# EAGLE board TMC2130-Eval_v13 (EAGLE 6.2)
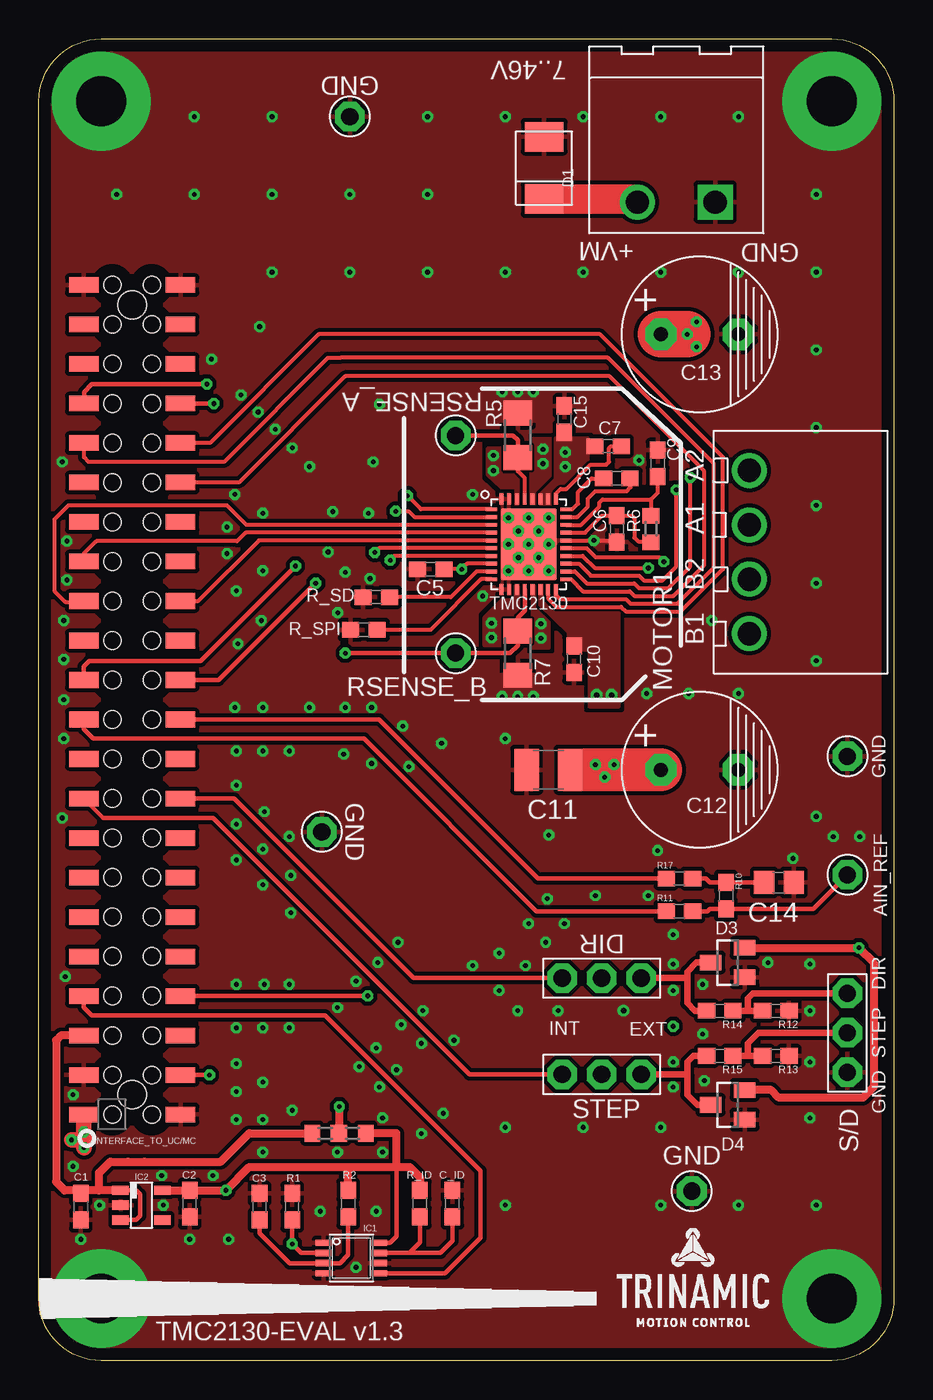
[diagram p0: board, top side]
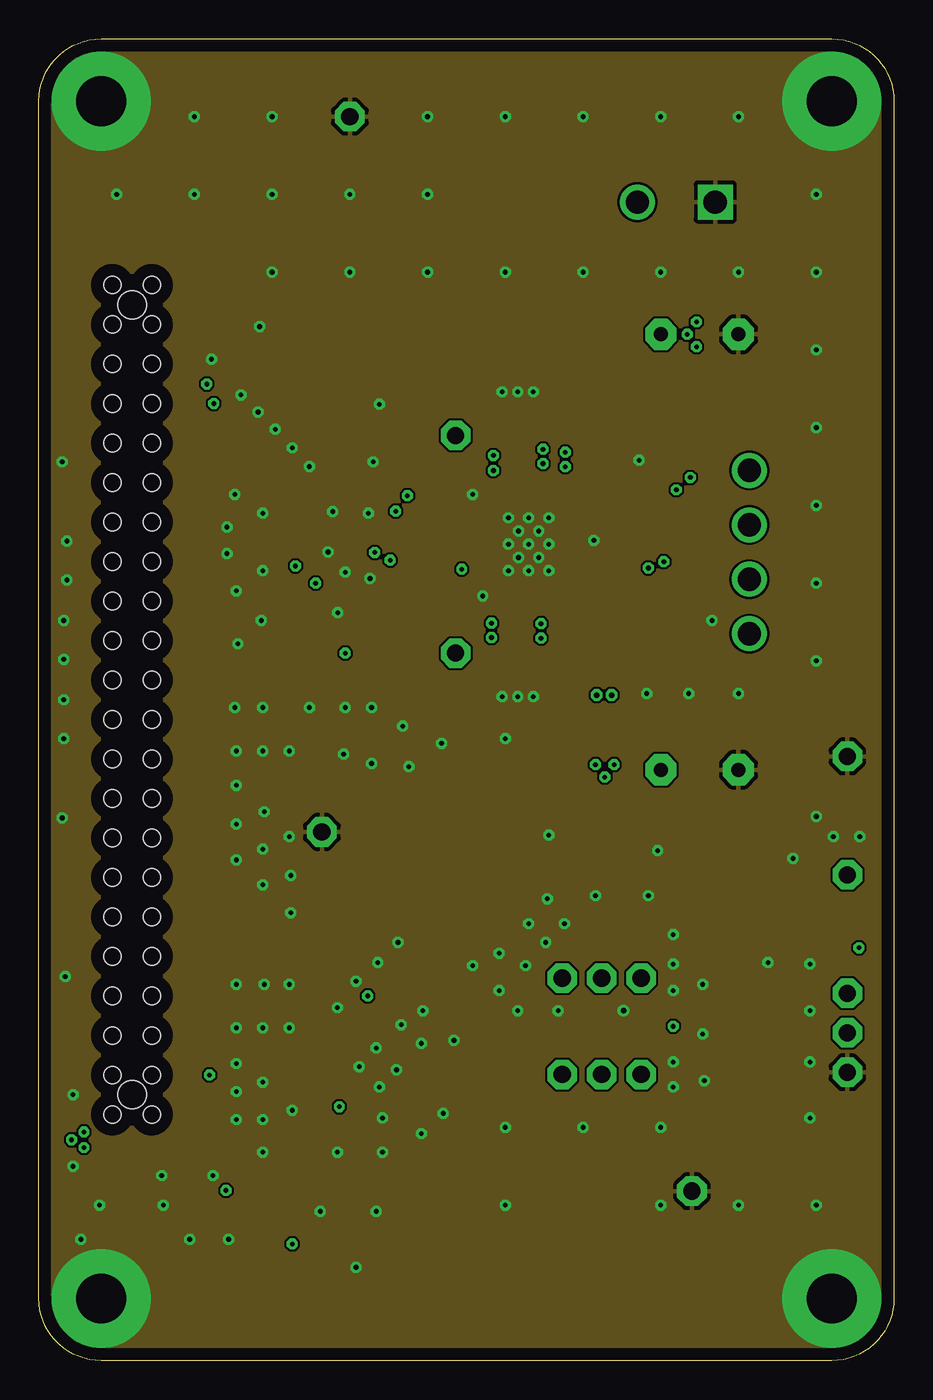
[diagram p1: board, inner layer Route2]
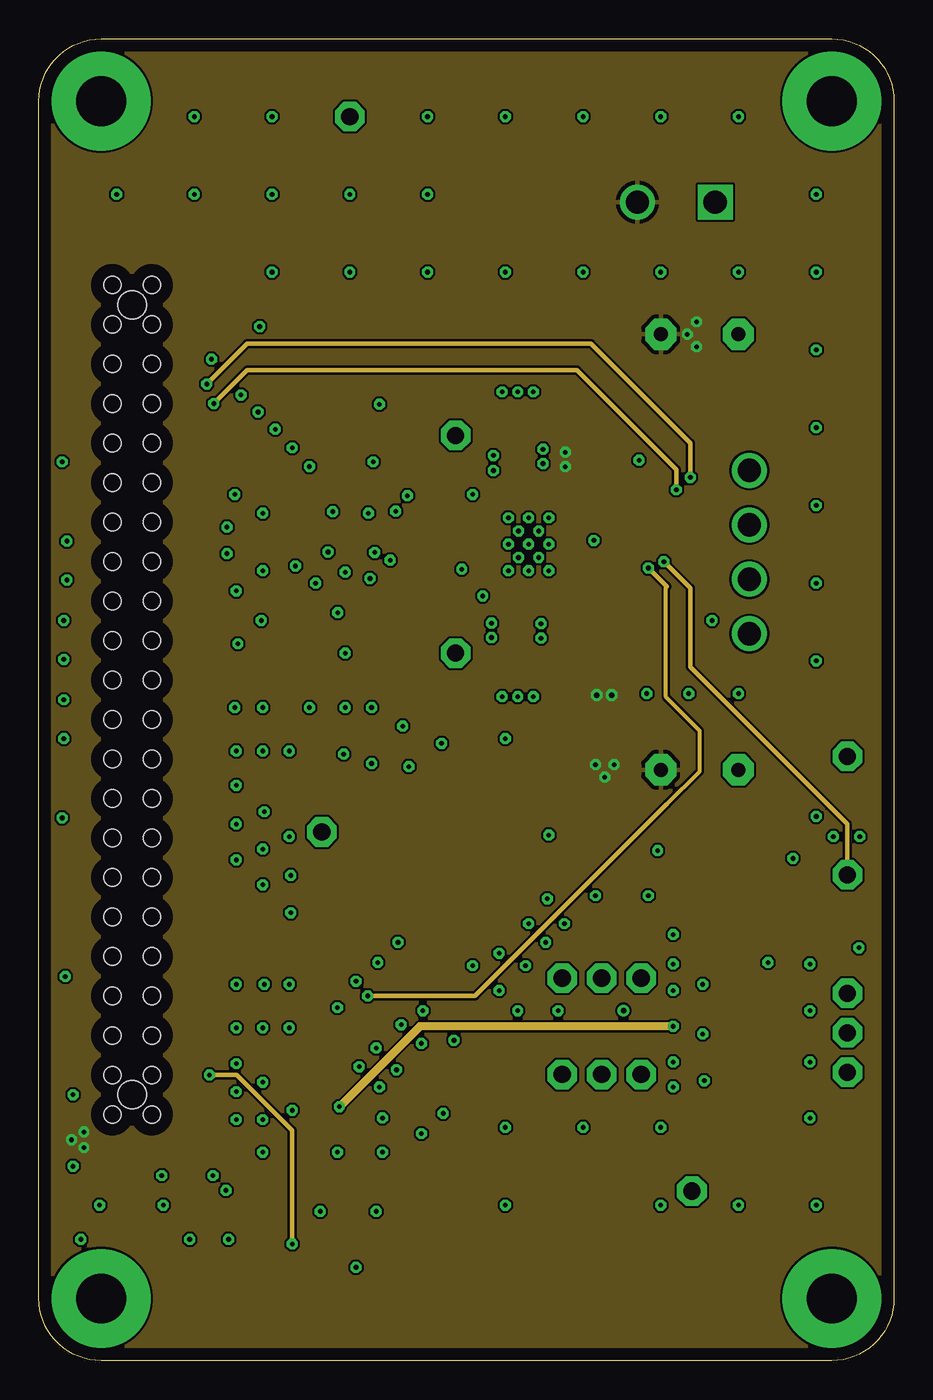
[diagram p2: board, inner layer Route3]
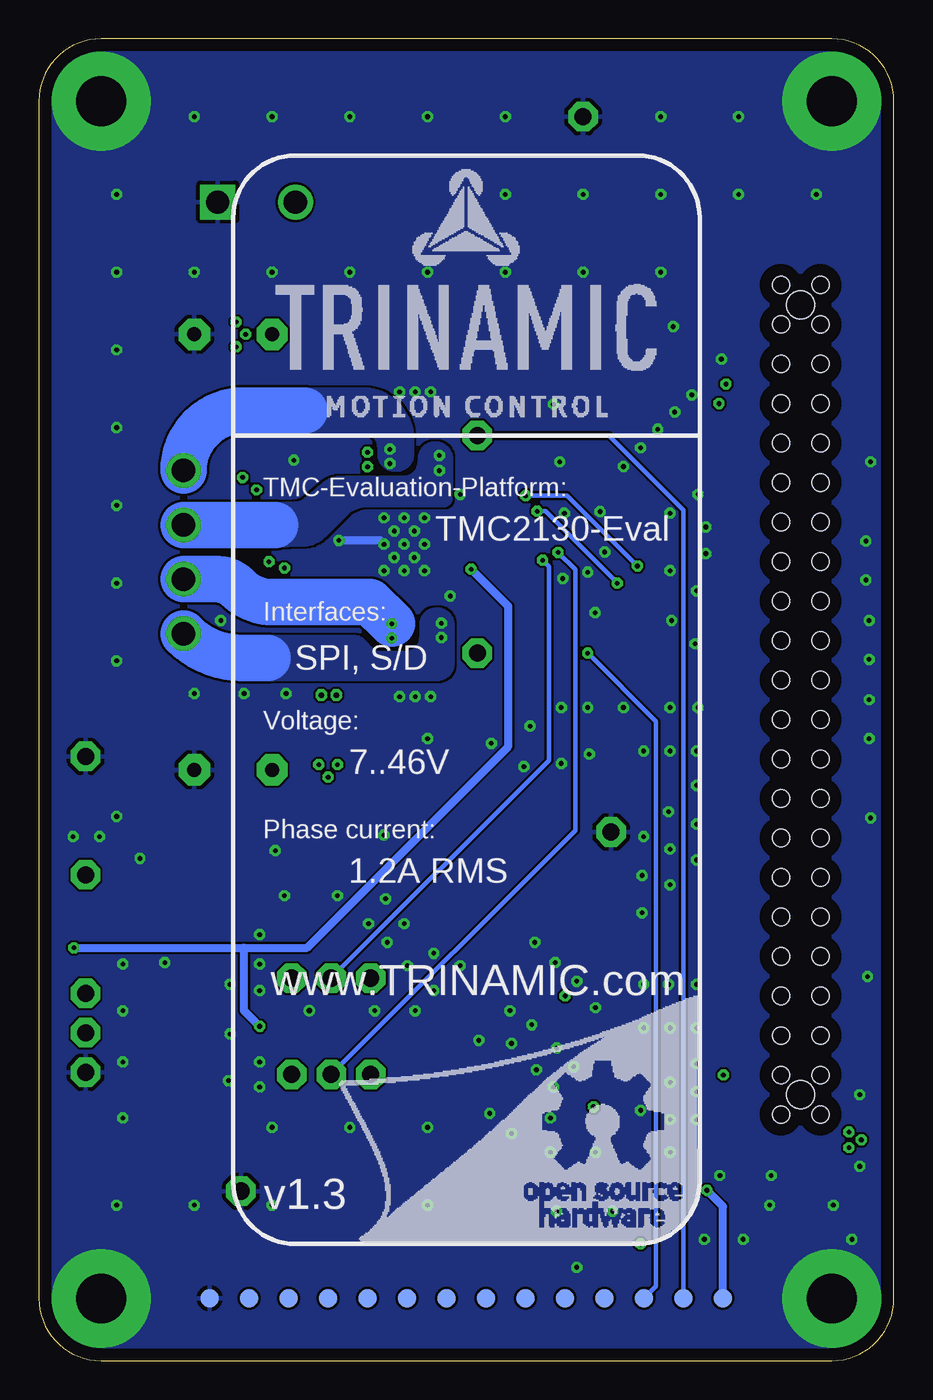
[diagram p3: board, bottom side, seen from below]

Size 55 x 85 mm. Coordinates in mm from the lower left corner, seen from the top.
Outline: 51,0 4,0 arc-90 0,4 0,81 arc-90 4,85 51,85 arc-90 55,81 55,4 arc-90 51,0
Copper layers (1*2*3*16): Top 0.018mm / dielectric 0.36mm / Route2 0.035mm / dielectric 0.71mm / Route3 0.035mm / dielectric 0.2mm / Bottom 0.018mm
Design rules: minimum track width 0.15mm, minimum drill 0.25mm, track to track 0.15mm, track to pad 0.15mm, pad to pad 0.1mm, via to via 0.15mm, smd to smd 0mil, copper to edge 0.8mm, drill to drill 8mil, minimum pad ring 10mil, minimum via ring 8mil, stop-mask expansion 4mil, vias tented up to drill 0.4mm, thermal gap 10mil
Net classes: 0 default: width 0.254 mm, drill 0.3 mm

## Footprints (pad centres in the part's own frame; a part is rotated, then mirrored left to right if it is on the bottom)
1PIN_1ROW_THT = drill 1.1 pad 1.9 octagon: 1 0,0
RCL_0603 = smd 1.1 x 1: 1 -0.85,0; 2 0.85,0
C0603 = smd 1.1 x 1: 1 -0.85,0; 2 0.85,0
C1210 = smd 1.6 x 2.7: 1 -1.4,0; 2 1.4,0
C_POL_RAD_THT_5X10X12.5 = drill 0.9 pad 2 octagon: + 2.5,0; - -2.5,0
C0805 = smd 1.3 x 1.5: 1 -0.95,0; 2 0.95,0
SMB = smd 1.9 x 2.5: A 2,0; C -2,0
SOT23 = smd 1 x 1.4: 1 -0.95,-1.1; 2 0.95,-1.1; 3 0,1.1
SN74LVC1G123DCTR = smd 0.4 x 1: 1 -0.975,-1.8; 2 -0.325,-1.8; 3 0.325,-1.8; 4 0.975,-1.8; 5 0.975,1.8; 6 0.325,1.8; 7 -0.325,1.8; 8 -0.975,1.8
SOT23-5 = smd 0.6 x 1.05: 1 -0.95,-1.35; 2 0,-1.35; 3 0.95,-1.35; 4 0.95,1.35; 5 -0.95,1.35
FEMALE_HEADER_SMD_254_44_PIN_SHORTPADS_HOLES = smd 1 x 1.9: 1 -26.67,3.11; 2 -26.67,-3.11; 3 -24.13,3.11; 4 -24.13,-3.11; 5 -21.59,3.11; 6 -21.59,-3.11; 7 -19.05,3.11; 8 -19.05,-3.11; 9 -16.51,3.11; 10 -16.51,-3.11; 11 -13.97,3.11; 12 -13.97,-3.11; 13 -11.43,3.11; 14 -11.43,-3.11; 15 -8.89,3.11; 16 -8.89,-3.11; 17 -6.35,3.11; 18 -6.35,-3.11; 19 -3.81,3.11; 20 -3.81,-3.11; 21 -1.27,3.11; 22 -1.27,-3.11; 23 1.27,3.11; 24 1.27,-3.11; 25 3.81,3.11; 26 3.81,-3.11; 27 6.35,3.11; 28 6.35,-3.11; 29 8.89,3.11; 30 8.89,-3.11; 31 11.43,3.11; 32 11.43,-3.11; 33 13.97,3.11; 34 13.97,-3.11; 35 16.51,3.11; 36 16.51,-3.11; 37 19.05,3.11; 38 19.05,-3.11; 39 21.59,3.11; 40 21.59,-3.11; 41 24.13,3.11; 42 24.13,-3.11; 43 26.67,3.11; 44 26.67,-3.11 | hole 1.8: -25.4,0; 25.4,0 | hole 1.1: -26.67,1.27; -24.13,1.27; -21.59,1.27; -19.05,1.27; -16.51,1.27; -13.97,1.27; -11.43,1.27; -8.89,1.27; -6.35,1.27; -3.81,1.27; -1.27,1.27; 1.27,1.27; 3.81,1.27; 6.35,1.27; 8.89,1.27; 11.43,1.27; 13.97,1.27; 16.51,1.27; 19.05,1.27; 21.59,1.27; 24.13,1.27; 26.67,1.27; -26.67,-1.27; -24.13,-1.27; -21.59,-1.27; -19.05,-1.27; -16.51,-1.27; -13.97,-1.27; -11.43,-1.27; -8.89,-1.27; -6.35,-1.27; -3.81,-1.27; -1.27,-1.27; 1.27,-1.27; 3.81,-1.27; 6.35,-1.27; 8.89,-1.27; 11.43,-1.27; 13.97,-1.27; 16.51,-1.27; 19.05,-1.27; 21.59,-1.27; 24.13,-1.27; 26.67,-1.27
AKL169_04_POL = drill 1.5: 1 -5.25,3.3; 2 -1.75,3.3; 3 1.75,3.3; 4 5.25,3.3
AKL349_02_POL = drill 1.5 square: 1 -2.5,4 | drill 1.5: 2 2.5,4
R1206 = smd 1.6 x 1.803: 1 -1.422,0; 2 1.422,0
R0603 = smd 1 x 1.1: 1 -0.85,0; 2 0.85,0
0603 = smd 1.1 x 1: 1 -0.85,0; 2 0.85,0
3PIN_1ROW_2,54_THT = drill 1.1 pad 1.9 octagon: 1 -2.54,0; 2 0,0; 3 2.54,0
PAD_R1.2 = smd 1.2 x 1.2: P$1 0,0
QFN36 = smd 0.7 x 0.25: 1 -2.4,2.25; 2 -2.4,1.75; 3 -2.4,1.25; 4 -2.4,0.75; 5 -2.4,0.25; 6 -2.4,-0.25; 7 -2.4,-0.75; 8 -2.4,-1.25; 9 -2.4,-1.75; 10 -2.4,-2.25; 19 2.4,-2.25; 20 2.4,-1.75; 21 2.4,-1.25; 22 2.4,-0.75; 23 2.4,-0.25; 24 2.4,0.25; 25 2.4,0.75; 26 2.4,1.25; 27 2.4,1.75; 28 2.4,2.25 | smd 0.25 x 0.7: 11 -1.75,-2.9; 12 -1.25,-2.9; 13 -0.75,-2.9; 14 -0.25,-2.9; 15 0.25,-2.9; 16 0.75,-2.9; 17 1.25,-2.9; 18 1.75,-2.9; 29 1.75,2.9; 30 1.25,2.9; 31 0.75,2.9; 32 0.25,2.9; 33 -0.25,2.9; 34 -0.75,2.9; 35 -1.25,2.9; 36 -1.75,2.9 | smd 3.6 x 4.6: GND_PAD 0,0

## Placement (x,y rotation side)
AIN_REF  NOT ASSEMBLED  [1PIN_1ROW_THT]  52,31.24 90 top
C1  0603/4.7µF/10V  [RCL_0603]  2.7,9.9 270 top
C2  0603/4.7µF/10V  [RCL_0603]  9.7,10.1 270 top
C3  0603/10nF/10V  [RCL_0603]  14.2,9.9 90 top
C5  C0603/100nF/50V  [C0603]  25.2,50.9 180 top
C6  C0603/4µ7/16V  [C0603]  37.17,53.49 270 top
C7  C0603/100nF/50V  [C0603]  36.61,58.8 0 top
C8  C0603/22nF/50V  [C0603]  37.17,56.74 0 top
C9  C0603/470nF/16V  [C0603]  39.8,57.7 270 top
C10  C0603/100nF/50V  [C0603]  34.42,45.11 90 top
C11  1210/4.7uF/100V  [C1210]  32.77,38 180 top
C12  EEUFR1J151 150uF/63V/0R045  [C_POL_RAD_THT_5X10X12.5]  42.5,38 180 top
C13  EEUFR1J151 150uF/63V/0R045  [C_POL_RAD_THT_5X10X12.5]  42.5,66 180 top
C14  0805/4µ7/50V  [C0805]  47.6,30.75 180 top
C15  C0603/100nF/50V  [C0603]  33.8,60.55 270 top
C_ID  C_ID/10V/1%  [RCL_0603]  26.6,10.1 90 top
D1  SMBJ43A  [SMB]  32.5,76.7 90 top
D3  BAT54S  [SOT23]  44.3,25.6 90 top
D4  BAT54S  [SOT23]  44.3,16.45 90 top
IC1  SN74LVC1G123DCTR  [SN74LVC1G123DCTR]  20.1,6.6 270 top
IC2  LP2985AIM5-3.3  [SOT23-5]  6.6,10 270 top
INTERFACE_TO_UC/MC  [FEMALE_HEADER_SMD_254_44_PIN_SHORTPADS_HOLES]  6,42.5 90 top
JMP1  JUMPER_2.54MM BLACK ON X2  [EXTRA_TERMINAL]  -3.02,0 0 top  (outside the outline)
JMP2  JUMPER_2.54MM BLACK ON X1  [EXTRA_TERMINAL]  -4.03,0 0 top  (outside the outline)
MOTOR1  AKL182_04_POL_HEADER  [AKL169_04_POL]  49,52 90 top
PROBE_GND  NOT ASSEMBLED  [1PIN_1ROW_THT]  18.2,34 0 top
PROBE_GND1  NOT ASSEMBLED  [1PIN_1ROW_THT]  52,38.86 180 top
PROBE_GND2  NOT ASSEMBLED  [1PIN_1ROW_THT]  42,10.9 0 top
PROBE_GND3  NOT ASSEMBLED  [1PIN_1ROW_THT]  20,80 180 top
PWR  AKL_349_02_POL_HEADER  [AKL349_02_POL]  41,78.5 180 top
R1  0603/10k/1%  [RCL_0603]  16.3,9.9 90 top
R2  10K  [RCL_0603]  19.9,10.1 270 top
R5  R1206,0R22/0.5W  [R1206]  30.8,59.5 270 top
R6  0603/2R2/1%  [R0603]  39.36,53.49 90 top
R7  R1206,0R22/0.5W  [R1206]  30.8,45.5 90 top
R8  NOT ASSEMBLED  [R0603]  18.43,14.62 180 top
R9  0603/0R  [R0603]  20.18,14.62 180 top
R10  10k/0603/1%  [RCL_0603]  44.2,29.9 270 top
R11  15k/0603/1%  [RCL_0603]  41.2,28.9 0 top
R12  0603/10k/1%  [0603]  47.4,22.5 180 top
R13  0603/10k/1%  [0603]  47.4,19.6 180 top
R14  0603/1k/1%  [0603]  43.8,22.5 180 top
R15  0603/1k/1%  [0603]  43.8,19.6 180 top
R17  4k7/0603/1%  [RCL_0603]  41.2,31 0 top
R_ID  R_ID/1%  [RCL_0603]  24.5,10.1 90 top
R_SD  NOT_ASSEMBLED  [RCL_0603]  21.7,49.1 0 top
R_SPI  NOT_ASSEMBLED  [RCL_0603]  20.9,47 0 top
REF2  MALE HEADER 2.54  [3PIN_1ROW_2,54_THT]  52,21.08 270 top
RSENSE_A  NOT ASSEMBLED  [1PIN_1ROW_THT]  26.8,59.5 0 top
RSENSE_B  NOT ASSEMBLED  [1PIN_1ROW_THT]  26.8,45.5 0 top
TERM1  AKL_330_2_POL_TERMINAL  [EXTRA_TERMINAL]  -1,-2 0 top
TERM2  AKL182_04_POL_TERMINAL  [EXTRA_TERMINAL]  -2,-4 0 top  (outside the outline)
TEST_POINT1  NOT ASSEMBLED  [PAD_R1.2]  11,4 0 bottom
TEST_POINT2  NOT ASSEMBLED  [PAD_R1.2]  13.54,4 0 bottom
TEST_POINT3  NOT ASSEMBLED  [PAD_R1.2]  16.08,4 0 bottom
TEST_POINT4  NOT ASSEMBLED  [PAD_R1.2]  18.62,4 0 bottom
TEST_POINT5  NOT ASSEMBLED  [PAD_R1.2]  21.16,4 0 bottom
TEST_POINT6  NOT ASSEMBLED  [PAD_R1.2]  26.24,4 0 bottom
TEST_POINT7  NOT ASSEMBLED  [PAD_R1.2]  23.7,4 0 bottom
TEST_POINT8  NOT ASSEMBLED  [PAD_R1.2]  28.78,4 0 bottom
TEST_POINT9  NOT ASSEMBLED  [PAD_R1.2]  31.32,4 0 bottom
TEST_POINT10  NOT ASSEMBLED  [PAD_R1.2]  33.86,4 0 bottom
TEST_POINT11  NOT ASSEMBLED  [PAD_R1.2]  36.4,4 0 bottom
TEST_POINT12  NOT ASSEMBLED  [PAD_R1.2]  38.94,4 0 bottom
TEST_POINT13  NOT ASSEMBLED  [PAD_R1.2]  41.48,4 0 bottom
TEST_POINT14  NOT ASSEMBLED  [PAD_R1.2]  44.02,4 0 bottom
TMC2130  TMC2130_QFN36  [QFN36]  31.5,52.5 0 top
U$1  [TMC_EVAL_RIGHT_BAR]  0,0 0 top
U$3  [TMC_EVAL_BACK_NO_DOCU]  55,0 0 bottom
X1  MALE HEADER 2.54  [3PIN_1ROW_2,54_THT]  36.2,18.4 180 top
X2  MALE HEADER 2.54  [3PIN_1ROW_2,54_THT]  36.2,24.6 180 top

## Library data of the parts
AIN_REF JMP1 JMP2 PROBE_GND PROBE_GND1-PROBE_GND3 REF2 RSENSE_A RSENSE_B X1 X2 = _TMC_TE_con
C1-C3 C_ID IC1 IC2 R1 R2 R10 R11 R17 R_ID R_SD R_SPI = TMC_EVAL_driver_TE_v01
C5-C11 C14 C15 R5-R9 = rcl
C12 C13 R12-R15 = _TMC_TE_RCL
D1 = _TMC_TE_D
D3 D4 = Trinamic; ADGPN: 3522154300; DATASHEET: http://www.nxp.com/documents/data_sheet/BAT54_SERIES.pdf; MANUF-CODE-1: BAT54S; MANUFACTURER-1: Philips; PRICE: 0.11
INTERFACE_TO_UC/MC = _TMC_TE_con; 1_PARTNUMBER: 098-3-044-1-NFX-YT0; 1_SUPPLIER: MPE Garry; 2_PARTNUMBER: HLE-122-02-F-DV-A; 2_SUPPLIER: Samtec
MOTOR1 = _TMC_TE_con; 1_PARTNUMBER: 31182104; 1_SUPPLIER: RIA CONNECT; 2_PARTNUMBER: AKL 182-04; 2_SUPPLIER: Reichelt
PWR = _TMC_TE_con; 1_PARTNUMBER: 31330102; 1_SUPPLIER: RIA CONNECT; 2_PARTNUMBER: AKL 330-02; 2_SUPPLIER: REICHELT
TERM1 = _TMC_TE_con; 1_PARTNUMBER: 31349102; 1_SUPPLIER: RIA CONNECT; 2_PARTNUMBER: AKL 349-02; 2_SUPPLIER: Reichelt
TERM2 = _TMC_TE_con; 1_PARTNUMBER: 31169104; 1_SUPPLIER: RIA CONNECT; 2_PARTNUMBER: AKL 169-04; 2_SUPPLIER: Reichelt
TEST_POINT1-TEST_POINT14 = _TMC_TE_PADS
TMC2130 = Trinamic
U$1 U$3 = _TMC_TE_LOGOS

## Nets
+3V3: C2.1 IC1.8 IC2.5 R2.1 R9.1 R_ID.2 TEST_POINT1.P$1
+5V_USB: C1.1 IC2.1 IC2.3 INTERFACE_TO_UC/MC.5 R8.2
[REFL]_STEP: TMC2130.6 X1.2
[REFR]_DIR: TMC2130.7 X2.2
AIN_REF: AIN_REF.1 R10.2 R11.2 TMC2130.23
AIN_REF_PWM: INTERFACE_TO_UC/MC.22 R17.1
AIN_REF_SW: INTERFACE_TO_UC/MC.21 R11.1
CLK: INTERFACE_TO_UC/MC.23 TMC2130.1
CSN_CFG3: INTERFACE_TO_UC/MC.24 TMC2130.2
DRV_ENN_CFG6: INTERFACE_TO_UC/MC.8 TMC2130.22
ENCA_DCIN_CFG5: INTERFACE_TO_UC/MC.34 TMC2130.19
ENCB_DCEN_CFG4: INTERFACE_TO_UC/MC.35 TMC2130.18
ENCN_DCO: INTERFACE_TO_UC/MC.36 TMC2130.17
EXT_DIR: D3.3 R14.2 X2.1
EXT_DIR_CON: R12.2 R14.1 REF2.1
EXT_STEP: D4.3 R15.2 X1.1
EXT_STEP_CON: R13.2 R15.1 REF2.2
GND: C1.2 C2.2 C3.2 C5.2 C6.2 C9.1 C10.1 C11.2 C12.- C13.- C14.1 C15.1 C_ID.2 D1.A D3.1 D4.1 IC1.1 IC1.4 IC1.6 IC2.2 INTERFACE_TO_UC/MC.2 INTERFACE_TO_UC/MC.3 INTERFACE_TO_UC/MC.43 INTERFACE_TO_UC/MC.44 PROBE_GND1.1 PROBE_GND2.1 PROBE_GND3.1 PROBE_GND.1 PWR.1 R1.2 R5.1 R7.1 R12.1 R13.1 R_SD.1 R_SPI.1 REF2.3 TEST_POINT14.P$1 TMC2130.11 TMC2130.12 TMC2130.24 TMC2130.35 TMC2130.36 TMC2130.GND_PAD
ID_CH1: IC1.5 INTERFACE_TO_UC/MC.7
ID_CLK: IC1.2 INTERFACE_TO_UC/MC.4 R1.1
INT_DIR: INTERFACE_TO_UC/MC.18 X2.3
INT_STEP: INTERFACE_TO_UC/MC.17 X1.3
M1A: MOTOR1.3 TMC2130.34
M1A2: MOTOR1.4 TMC2130.32
M1B1: MOTOR1.1 TMC2130.13
M1B2: MOTOR1.2 TMC2130.15
N$1: C3.1 IC1.3 R2.2
N$2: C_ID.1 IC1.7 R_ID.1
N$3: R_SPI.2 TMC2130.10
N$5: R_SD.2 TMC2130.9
N$7: C6.1 R6.1 TMC2130.25
N$8: C8.1 TMC2130.28
N$9: C8.2 TMC2130.27
N$10: C7.2 TMC2130.29
N$11: C9.2 R6.2 TMC2130.26
N$14: C14.2 R10.1 R17.2
SCK_CFG2: INTERFACE_TO_UC/MC.27 TMC2130.3
SDI_NAI_CFG1: INTERFACE_TO_UC/MC.29 TMC2130.4
SDO_NAO_CFG0: INTERFACE_TO_UC/MC.28 TMC2130.5
SENSEA: R5.2 RSENSE_A.1 TEST_POINT2.P$1 TMC2130.33
SENSEB: R7.2 RSENSE_B.1 TEST_POINT3.P$1 TMC2130.14
SEP_DIAG1: INTERFACE_TO_UC/MC.38 TMC2130.21
SWN_DIAG0: INTERFACE_TO_UC/MC.37 TMC2130.20
VCC_IO: C5.1 D3.2 D4.2 R8.1 R9.2 TMC2130.8
VM: C7.1 C10.2 C11.1 C12.+ C13.+ C15.2 D1.C INTERFACE_TO_UC/MC.1 PWR.2 TMC2130.16 TMC2130.30 TMC2130.31

## Tracks (layer width: path | path; a pad name or v marks a point on that pad's centre or on a via)
+3V3  (via drill 0.3)
  Top 0.3: IC1.8 22.57,7.58 23,8 23,12.45
  Top 0.406: 21.05,14.6 R9.1
  Top 0.5: IC2.5 C2.1 v12.03,10.95 13.53,12.45 19.9,12.45 | 19.9,12.45 22.7,12.45 23,12.45 | 23,12.45 23.85,12.45 24.5,11.8 R_ID.2 | R2.1 19.9,12.45 | 23,12.45 23,14.62 R9.1
  Bottom 0.5: TEST_POINT1.P$1 11,9.92 v12.03,10.95
+5V_USB
  Top 0.3: IC2.1 6.25,10.95 6.5,10.7 6.5,9.3 6.25,9.05 IC2.3
  Top 0.5: IC2.1 3.88,10.95 | 3.88,10.95 2.5,10.95 | 2.5,10.95 C1.1 | 2.51,20.91 INTERFACE_TO_UC/MC.5 1.41,20.91 1.1,20.6 1.1,11.5 1.65,10.95 2.5,10.95 | R8.2 13.53,14.62 11.7,12.8 6.8,12.8 5.73,12.8 4.6,12.8 3.88,12.08 3.88,10.95
[REFL]_STEP  (via drill 0.3)
  Top 0.254: TMC2130.6 21.88,52.25 v21.6,51.98
  Bottom 0.3: X1.2 20.5,34.1 20.5,50.88 v21.6,51.98
[REFR]_DIR  (via drill 0.3)
  Top 0.254: TMC2130.7 22.88,51.75 v22.6,51.48
  Bottom 0.3: X2.2 22.2,38.6 22.2,51.08 v22.6,51.48
AIN_REF  (via drill 0.3)
  Top 0.254: TMC2130.23 35.23,52.25 35.8,51.67 39.9,51.67 v40.2,51.38
  Top 0.3: R11.2 43,28.9 43.15,29.05 R10.2 49.81,29.05 AIN_REF.1
  Route3 0.3: AIN_REF.1 52,34.5 41.9,44.6 41.9,49.67 v40.2,51.38
AIN_REF_PWM
  Top 0.3: INTERFACE_TO_UC/MC.22 21.87,41.23 32.1,31 R17.1
AIN_REF_SW
  Top 0.3: INTERFACE_TO_UC/MC.21 2.89,40.61 3.5,40 20.9,40 32,28.9 R11.1
CLK  (via drill 0.3)
  Top 0.254: TMC2130.1 24.57,54.75 v23.7,55.62
  Top 0.3: INTERFACE_TO_UC/MC.23 2.89,44.64 3.25,45 10.4,45 v16.5,51.1
  Bottom 0.3: v23.7,55.62 21.02,55.62 v16.5,51.1
CSN_CFG3  (via drill 0.3)
  Top 0.254: v22.95,54.62 23.77,54.62 24.15,54.25 TMC2130.2
  Top 0.3: INTERFACE_TO_UC/MC.24 11.57,43.77 v17.8,50
  Bottom 0.254: 22.52,54.62 v22.95,54.62
  Bottom 0.3: v17.8,50 22.43,54.62 v22.95,54.62
DRV_ENN_CFG6  (via drill 0.3)
  Top 0.254: TMC2130.22 34.98,51.75 35.75,50.98 v39.2,50.98
  Top 0.3: INTERFACE_TO_UC/MC.8 v21.15,23.45
  Route3 0.254: 40.4,35.8 42.5,37.9 42.5,40.5 40.34,42.66 40.34,49.84
  Route3 0.3: v39.2,50.98 40.34,49.84 40.4,49.77 | 40.4,35.8 28.05,23.45 v21.15,23.45
ENCA_DCIN_CFG5
  Top 0.254: TMC2130.19 34.23,50.25 35,49.48 38,49.48 38.3,49.17 40.8,49.17 42.8,51.17 42.8,57.2 36.7,63.3 19.7,63.3 12.87,56.47 INTERFACE_TO_UC/MC.34
ENCB_DCEN_CFG4
  Top 0.254: TMC2130.18 33.25,49.23 33.5,48.98 37.75,48.98 38.05,48.67 41.08,48.67 43.4,51 43.4,57.7 36.6,64.5 19.4,64.5 18.6,64.5 11.9,57.8 3.2,57.8 2.9,58.1 INTERFACE_TO_UC/MC.35
ENCN_DCO
  Top 0.254: TMC2130.17 32.75,49.02 33.3,48.48 37.45,48.48 37.75,48.17 41.27,48.17 44,50.9 44,58.1 36.1,66 18,66 11.01,59.01 INTERFACE_TO_UC/MC.36
EXT_DIR
  Top 0.406: R14.2 42.2,22.5 41.7,23 41.7,24.6 | 41.7,24.6 41.7,25 42.3,25.6 D3.3 | X2.1 41.7,24.6
EXT_DIR_CON
  Top 0.406: R14.1 45.6,22.5 | 45.6,22.5 R12.2 | 45.6,22.5 45.6,23.3 45.92,23.62 REF2.1
EXT_STEP
  Top 0.406: R15.2 42.1,19.6 41.7,19.2 41.7,18.4 | 41.7,18.4 41.7,17.1 42.35,16.45 D4.3 | X1.1 41.7,18.4
EXT_STEP_CON
  Top 0.406: R15.1 45.6,19.6 | 45.6,19.6 R13.2 | 45.6,19.6 45.6,20.4 46.28,21.08 REF2.2
GND  (via drill 0.3, 0.3 pad 0.3, 0.35, 3.2 pad 6.35)
  Top 0.254: 33,52.75 32.8,52.55 32.8,52.75 | 37.17,52.75 C6.2 37.06,52.75 v35.7,52.75 TMC2130.24
  Bottom 0.5: v32.8,52.5 33.05,52.75 v35.7,52.75
  other vias: 4,81 4,4 51,81 51,4 12.2,7.8 18.1,9.6 21.7,9.6 8,10 3.9,10 2.2,12.5 2.7,7.8 9.7,7.8 20.4,6 29.8,42.7 29.8,62.3 30.8,62.3 31.8,62.3 28.55,49.17 37.6,22.5 49.6,22.5 49.6,19.2 49.6,25.5 49.6,15.6 12.7,37 31.8,42.7 30.8,42.7 14.5,24.2 2.2,17.1 14.4,21.4 12.7,21.4 12.7,24.2 16.1,24.2 16.1,21.4 7.9,11.9 11.2,11.9 14.4,13.4 19.2,13.4 14.4,15.5 12.7,15.5 16.3,16.1 14.4,17.9 12.7,17.3 12.7,19.1 22.1,13.4 22.1,15.6 24.6,14.6 26,15.9 21.9,17.6 20.6,18.9 21.7,20.1 23,18.7 19.2,22.7 24.6,20.4 23.3,21.6 24.7,22.5 26.7,20.6 20.4,24.4 21.8,25.6 23.1,26.9 14.4,30.6 12.7,32.2 16.2,28.8 16.2,31.2 14.4,32.9 12.7,34.5 14.5,35.3 16.1,33.7 30.8,22.5 33.4,22.5 31.3,25.4 27.9,25.4 29.6,26.2 29.6,23.8 33.8,28.1 32.6,26.9 31.5,28.1 32.7,29.7 35.8,29.9 32.8,33.8 23.8,38.2 19.6,39 21.4,42 21.4,38.4 23.4,40.8 25.9,39.7 19.7,42 42.8,18 42.7,21 42.7,24.2 40.8,23.8 40.8,25.5 40.8,27.4 40.8,19.2 40.8,17.6 46.9,25.6 39.2,29.9 48.5,32.3 14.4,39.2 12.7,39.2 16.1,39.2 17.4,42 14.4,42 12.6,42 12.8,46.1 14.3,47.6 12.7,49.5 14.4,50.8 12.1,51.9 12.1,53.6 12.6,55.7 14.4,54.5 13,62.1 21.2,54.5 18.6,52 21.3,50.3 19.23,48.1 18.9,54.6 19.7,50.7 27.9,55.7 16.3,58.7 17.4,57.5 14.1,61 15.2,59.9 11.1,64.4 51.1,33.7 52.8,33.7 39.1,42.9 41.8,42.9 45,42.9 10,80 15,80 20,75 5,75 10,75 15,75 25,80 30,80 35,80 40,80 45,80 25,75 50,75 15,70 20,70 25,70 30,70 35,70 40,70 45,70 50,70 50,65 50,60 21.9,61.5 50,55 50,50 50,45 50,35 30,40 50,10 45,10 40,10 30,10 30,15 35,15 40,15 21.5,57.8 14.2,66.5 38.6,57.9 43.3,47.6 1.7,24.7 1.5,34.9 1.6,40 1.6,42.5 1.6,45.1 1.6,47.6 1.8,50.2 1.8,52.7 1.5,57.8 30.2,54.2 30.85,53.35 32.15,53.35 30.2,52.5 31.5,52.5 30.85,51.65 32.15,51.65 30.2,50.8 31.5,50.8 32.8,50.8 31.5,54.2 32.8,54.2 39.8,32.8
  pour Top (isolate 0.254, rank 6): 0,85 55,85 55,0 0,0
  pour Bottom (rank 6): 0,85 55,85 55,0 0,0
  pour Route2 (rank 6): 0,85 55,85 55,0 0,0
  pour Top (no thermals): 29.18,43.92 32.3,43.92 32.3,41.92 29.18,41.92
  pour Top (no thermals): 29.3,62.73 32.3,62.73 32.3,60.42 29.3,60.42
ID_CH1
  Top 0.3: IC1.5 26.12,5.62 28.4,7.9 28.4,12.2 18.4,22.2 3.4,22.2 2.89,22.71 INTERFACE_TO_UC/MC.7
ID_CLK  (via drill 0.3)
  Top 0.3: R1.1 v16.3,7.5 16.88,6.92 IC1.2 | INTERFACE_TO_UC/MC.4 v10.97,18.37
  Route3 0.3: v16.3,7.5 16.3,14.8 12.73,18.37 v10.97,18.37
INT_DIR
  Top 0.3: INTERFACE_TO_UC/MC.18 12.55,36.15 24.1,24.6 X2.3
INT_STEP
  Top 0.254: INTERFACE_TO_UC/MC.17 4.14,34.9
  Top 0.3: 4.14,34.9 11.2,34.9 27.7,18.4 X1.3
M1A  (via drill 0.3)
  Bottom 3: 39.8,53.75 MOTOR1.3
  other vias: 29.24,58.21 29.24,57.24
  pour Top (rank 2, no thermals): 30.8,55.11 30.8,56.92 29.74,56.92 29.74,58.64 28.86,58.64 28.86,56.99 29.74,56.17 30.68,56.17 30.68,55.11
  pour Bottom: 39.8,55.12 38.49,55.12 arc-41 37.83,55.37 36.77,56.31 arc41 35.45,56.8 31.5,56.8 arc-90 30.5,57.8 30.5,58 arc90 29.5,59 arc90 28.5,58 28.5,55.5 arc90 29,55 33.87,55 arc-45 35.29,54.41 36.67,53.03 arc44 38.03,52.45 39.8,52.4
M1A2  (via drill 0.3)
  Bottom 3: 37.9,61.1 41.85,61.1 arc-90 MOTOR1.4
  other vias: 32.42,58.61 32.42,57.69
  pour Top (rank 2, no thermals): 31.68,55.11 31.68,57.55 31.86,57.55 31.86,59.3 32.92,59.3 32.92,56.8 31.99,55.8 31.99,55.11
  pour Bottom: 38.1,59.75 34.1,59.75 arc90 33.1,58.75 33.1,58.3 arc-90 32.1,57.3 32,57.3 arc-90 31,58.3 31,59.2 arc-90 34.1,62.45 38.1,62.45
M1B1  (via drill 0.3)
  Bottom 3: MOTOR1.1 45.68,46.73 arc-45 41.99,45.2 40.3,45.2
  other vias: 29.11,47.42 29.11,46.5
  pour Top (no thermals): 30.8,49.8 30.8,47.92 29.8,47.92 29.8,45.99 28.68,45.99 28.68,47.8 29.8,48.92 30.68,48.92 30.68,49.8
  pour Bottom: 33.15,45.5 31.4,45.5 arc-90 30.4,46.5 30.4,47.3 arc90 29.4,48.3 arc90 28.4,47.3 28.4,44.84 arc90 29.4,43.84 41.7,43.84 41.73,46.55 34.83,46.55 arc46 34.1,46.24 33.57,45.68 arc-46
M1B2  (via drill 0.3)
  Bottom 3: MOTOR1.2 43.5,50.25 arc45 42.26,49.74 arc-45 39.94,48.77 33.69,48.77 v32.3,47.39
  other vias: 32.3,46.46
  pour Top (rank 2, no thermals): 31.74,49.8 31.74,45.85 32.8,45.85 32.8,48.05 31.86,48.8 31.86,49.8
N$1
  Top 0.3: C3.1 14.2,8.2 16.12,6.28 IC1.3 19.38,6.28 19.9,6.8 R2.2
N$2
  Top 0.3: R_ID.1 24.5,7.6 23.82,6.92 | IC1.7 23.82,6.92 | C_ID.1 26.6,7.7 25.82,6.92 23.82,6.92
N$3
  Top 0.254: R_SPI.2 25.2,47 28.45,50.25 TMC2130.10
N$4
  pour Bottom (isolate 0.1): 33.2,53.05 35.7,53.05 arc-90 36,52.75 arc-90 35.7,52.45 33.2,52.45
  pour Route3 (isolate 0.1): 35.7,53.05 arc-90 36,52.75 arc-90 35.7,52.45 arc-90 35.4,52.75 arc-90
  pour Route2 (isolate 0.1): 35.7,53.05 arc-90 36,52.75 arc-90 35.7,52.45 arc-90 35.4,52.75 arc-90
N$5
  Top 0.254: R_SD.2 26.5,49.1 28.15,50.75 TMC2130.9
N$7
  Top 0.254: TMC2130.25 35.12,53.25 36.21,54.34 C6.1 38.14,54.34 38.3,54.17 38.3,52.92 38.55,52.67 39.33,52.67 R6.1
N$8
  Top 0.254: TMC2130.28 34.31,54.75 34.67,55.11 34.67,55.86 35.55,56.74 C8.1
N$9
  Top 0.254: TMC2130.27 34.62,54.25 35.3,54.92 35.3,55.42 35.77,55.9 37.77,55.9 38.05,56.17 38.05,56.71 C8.2
N$10
  Top 0.254: TMC2130.29 33.25,55.75 33.55,56.05 33.92,56.05 35.49,57.61 36.49,57.61 36.67,57.8 36.67,58.67 36.8,58.8 C7.2 37.34,58.67
N$11
  Top 0.254: TMC2130.26 34.88,53.75 36.05,54.92 36.05,55.17 36.26,55.39 39.36,55.39 | C9.2 39.8,55.83 39.36,55.39 | 39.36,55.39 R6.2
N$14
  Top 0.3: R17.2 42.9,31 43.15,30.75 R10.1 C14.2
SCK_CFG2
  Top 0.254: INTERFACE_TO_UC/MC.27 2.84,48.8 1.7,48.8 1,49.5 1,54.1 1.9,55 12.1,55 13.35,53.75 TMC2130.3
SDI_NAI_CFG1
  Top 0.254: INTERFACE_TO_UC/MC.29 2.89,51.89 3.7,52.7 12.75,52.7 13.3,53.25 TMC2130.4
SDO_NAO_CFG0
  Top 0.254: INTERFACE_TO_UC/MC.28 10.25,48.85 14.15,52.75 TMC2130.5
SENSEA
  Top 0.254: TMC2130.33 31.25,56.75 30.8,57.2 R5.2
  Top 0.3: RSENSE_A.1 30.5,59.5 30.8,59.2 R5.2
  Bottom 0.3: RSENSE_A.1 18.34,59.5 15.67,56.83 13.84,55 13.54,54.7 TEST_POINT2.P$1
SENSEB  (via drill 0.3)
  Top 0.3: TMC2130.14 31.25,48.25 30.8,47.8 R7.2 30.8,46 30.3,45.5 RSENSE_B.1 v19.7,45.5
  Bottom 0.3: TEST_POINT3.P$1 15.3,4.78 15.3,41.1 v19.7,45.5
  pour Top (rank 3, no thermals): 30.18,46.3 31.43,46.3 31.18,47.17 30.18,47.17
SEP_DIAG1  (via drill 0.3)
  Top 0.254: TMC2130.21 34.73,51.25 35.5,50.48 38.6,50.48 38.9,50.17 40.1,50.17 41,51.08 v41,56
  Top 0.3: INTERFACE_TO_UC/MC.38 v11.25,61.55
  Route3 0.3: v41,56 41,57.3 34.6,63.7 13.4,63.7 v11.25,61.55
SWN_DIAG0  (via drill 0.3)
  Top 0.254: TMC2130.20 34.48,50.75 35.25,49.98 38.3,49.98 38.6,49.67 40.5,49.67 41.9,51.08 v41.9,56.8
  Top 0.3: 2.89,61.36 INTERFACE_TO_UC/MC.37 2.9,62.3 3.4,62.8 v10.8,62.8
  Route3 0.3: v41.9,56.8 41.9,59 35.5,65.4 14.3,65.4 13.4,65.4 v10.8,62.8
VCC_IO  (via drill 0.3)
  Top 0.254: C5.1 v27.2,50.9 27.55,51.25 TMC2130.8
  Top 0.3: R8.1 R9.2
  Top 0.5: D4.2 47.1,17.4 47.6,16.9 53,16.9 53.7,17.6 53.7,25.6 v52.75,26.55 D3.2 | R9.2 v19.32,16.32
  Route3 0.5: v19.32,16.32 24.5,21.5 v40.8,21.5
  Bottom 0.5: v52.75,26.55 41.8,26.55 | 41.8,26.55 37.75,26.55 24.8,39.5 24.8,48.5 v27.2,50.9 | v40.8,21.5 41.8,22.5 41.8,26.55
VM  (via drill 0.3, 0.35)
  Top 0.3: v35.8,38.33 35.8,38 35.17,38 C11.1
  Top 1: INTERFACE_TO_UC/MC.1 v2.89,14.71 | v2.89,14.71 v2.9,14.7 2.9,14.2 v2.1,14.2 | v2.89,14.71 v2.89,13.71 v2.9,13.7
  Top 1.9: PWR.2 38.3,74.7 D1.C
  Top 2.75: C12.+ 35.17,38
  Top 3: C13.+ v41.7,66
  other vias: 33.86,58.41 33.86,57.49 35.88,42.8 36.84,42.8 42.3,65.2 42.3,66.8 37,38.33 36.4,37.52
  pour Route3 (isolate 0.1, rank 5): 0,85 55,85 55,0 0,0
  pour Top (no thermals): 32.24,49.8 32.24,48.61 34.05,46.86 34.05,45.74 35.4,45.74 35.4,42.08 37.3,42.08 37.3,49.8
  pour Top (no thermals): 32.24,55.11 32.92,55.11 32.92,55.61 35.3,57.86 35.3,59.3 33.24,59.3 33.24,56.67 32.24,55.67

## Text on the board
Top: Top
Route2: Inner1
Route3: Inner2
Bottom: Bottom
tPlace: 7..46V | GND | +VM | GND | A2 | Silkscreen Top | A1 | B2 | B1 | GND | GND | DIR | DIR | INT | EXT | STEP | GND | STEP | GND | S/D | TMC2130-EVAL v1.3
bPlace: TMC-Evaluation-Platform: | TMC2130-Eval | Silkscreen Bottom | Interfaces: | SPI, S/D | Voltage: | 7..46V | Phase current: | 1.2A RMS | v1.3